# Altium PCB e-puck3-camera-4L_temp2l.PcbDoc
Units mm, origin at the board's own origin, x right, y up, seen from the top; angles counter-clockwise.
Board outline 10 x 72.98 mm, 2 copper layers (Top Layer, Bottom Layer), stack 0.049 mm thick; 16 components, 29 nets, 158 pads, 55 vias.
Unrouted connection lines stored in the file: 68.
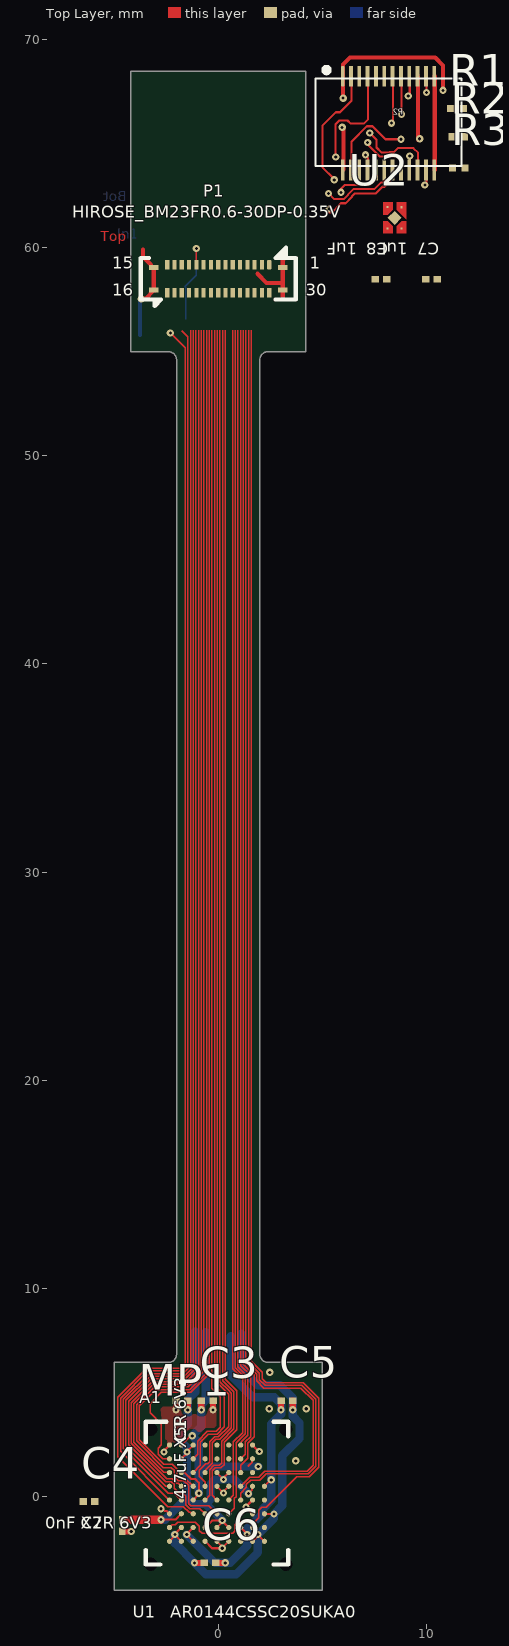
[diagram p0: Top Layer view]
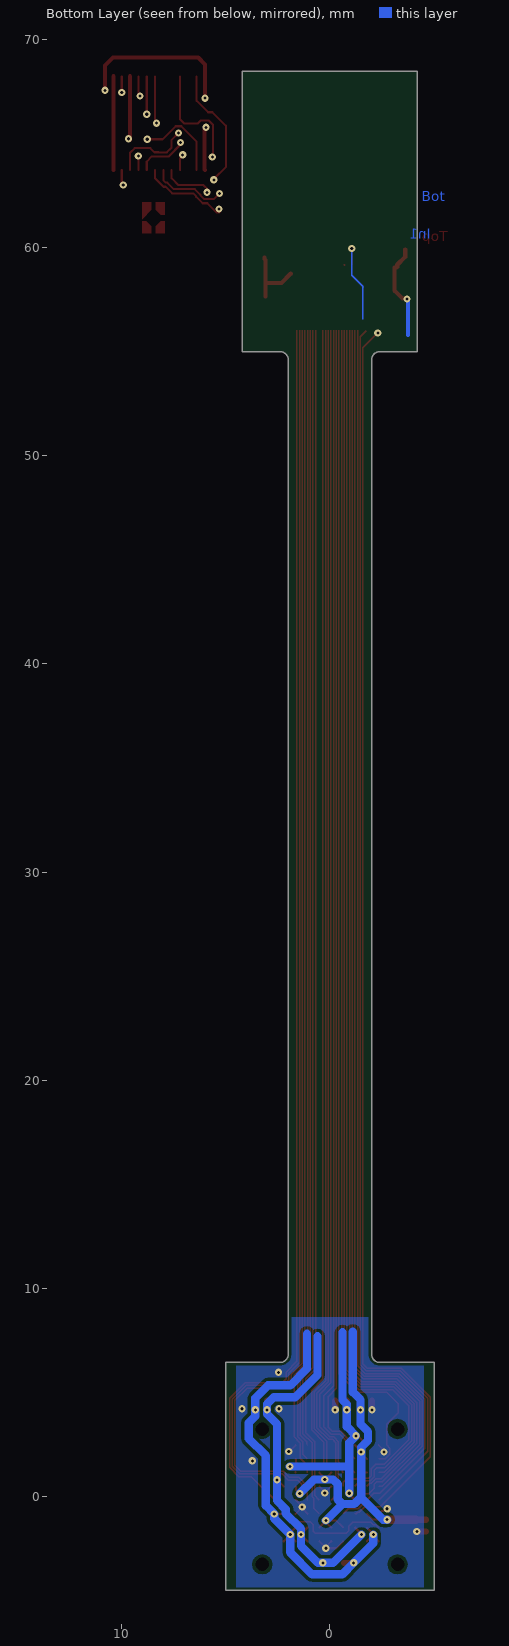
[diagram p1: Bottom Layer view, seen from below]

## Layer stack, top to bottom
Top Solder: solder mask 0.028, Solder Resist, Dk 3.5
Top Layer: signal copper 0.012
Dielectric2: prepreg 0.025, Prepeg, Dk 4.1
Bottom Layer: signal copper 0.012
Bottom Solder: solder mask 0.027, Solder Resist, Dk 3.5

## Board outline
-5,6.45 -2.4,6.45 ccw(c-2.4,6.85) -2,6.85 -2,54.6 ccw(c-2.4,54.6) -2.4,55 -4.2,55 -4.2,68.475 4.2,68.475 4.2,55 2.4,55 ccw(c2.4,54.6) 2,54.6 2,6.85 ccw(c2.4,6.85) 2.4,6.45 5,6.45 5,-4.5 -5,-4.5

## Design rules (kind name [scope] priority, off if disabled: settings)
AcuteAngle [All] p1 off: minimum=8.80000000000000E+0001 checktracksonly=FALSE
BoardOutlineClearance [All] p1: gap=0.15 ignorepadtopadclearanceinfootprint=FALSE
Clearance Clearance_Normal_Polygon [InPolygon] p1: gap=0.15 ignorepadtopadclearanceinfootprint=FALSE except(0: Arc-Hole Track-Hole SMDPad-Hole THPad-Hole Via-Hole Fill-Hole Poly-Hole Region-Hole Text-Hole)
Clearance Clearance_Normal [All] p2: gap=0.064 ignorepadtopadclearanceinfootprint=FALSE
ComponentClearance [All] p1: gap=0.3 collisioncheckmode=3 verticalgap=0.3 showdistances=TRUE
FabricationTestPointUsage TestPointUsage [All] p1: valid=0 allowmultiple=FALSE
FabricationTestpoint Testpoint [(IsPad And (OnTopLayer Or OnBottomLayer))] p1: side=3 testpointundercomponent=TRUE minsize=1.016 maxsize=2.54 preferedsize=1.524 minholesize=0 maxholesize=1.016 preferedholesize=0.813 testpointgrid=0.025 allowsidetop=TRUE allowsidebottom=TRUE usegrid=TRUE gridtolerance=0
Height [All] p1 off: minheight=0 maxheight=25.4 prefheight=12.7
HoleSize [All] p1: absolutevalues=TRUE maxlimit=6 minlimit=0.15 maxpercent=80.000 minpercent=20.000
MinimumAnnularRing [All] p1: minimumring=0.1
MinimumSolderMaskSliver [All] p1: minsoldermaskwidth=0.25
PlaneClearance [All] p1: clearance=0.4
PlaneConnect [All] p1: planeconnectstyle=Relief reliefexpansion=0.508 reliefentries=4 reliefconductorwidth=0.2 reliefairgap=0.15
PolygonConnect PolygonConnect_Via [IsVia] p1: connectstyle=Direct reliefconductorwidth=0.254 reliefentries=4 polygonreliefangle="90 Angle" airgapwidth=0.254
PolygonConnect [All] p2: connectstyle=Relief reliefconductorwidth=0.2 reliefentries=4 polygonreliefangle="90 Angle" airgapwidth=0.1
RoutingCorners [All] p1: cornerstyle=45-Degree minsetback=1 maxsetback=2.54
RoutingVias [All] p1: holewidth=0.15 width=0.35 viastyle="Through Hole" minholewidth=0.15 minwidth=0.35 maxholewidth=1 maxwidth=4
SMDToCorner [All] p1 off: distance=78740
SMDToPlane [All] p1 off: distance=118110
SilkToSilkClearance [All] p1: silktosilkclearance=0.2
SilkToSolderMaskClearance SilkscreenOverComponentPads [IsPad] p1: minsilkscreentomaskgap=0.2 clearancetoexposedcopper=TRUE
SolderMaskExpansion SolderMaskExpansion_Via [isVia] p1: expansion=-5 istentingtop=FALSE
SolderMaskExpansion [All] p2: expansion=0.1 istentingtop=FALSE
ViasUnderSMD [All] p1: allowed=FALSE
Width [All] p1: maxlimit=5 minlimit=0.064 preferedwidth=0.075 minimp=50.000000 maximp=50.000000 favimp=50.000000
19 further rules are at their usual default settings.

## Classes and differential pairs
net class HighFreq: D0 D1 D2 D3 D4 D5 D6 D7 D8 D9 D10 D11 HSYNC MCLK PIXCLK VSYNC
net class D[0..11]: D0 D1 D2 D3 D4 D5 D6 D7 D8 D9 D10 D11
net class DigitalPowers: D1V2 D3V0 DGND
net class AnalogPowers: A3V0 AGND

## Components (designator, comment, footprint, x,y, rotation, side; value= is the part's Value field where it differs from the comment)
C1 "4.7uF X5R 6V3" CAPC0201(0603)33_L -1.745,4.615 r180 top
C2 "100nF X7R 6V3" CAPC0201(0603)33_L -4.615,-1.385 r270 top
C3 "4.7uF X5R 6V3" CAPC0201(0603)33_L -0.53,4.615 r0 top
C4 "100nF X7R 6V3" CAPC0201(0603)33_L -6.2,-0.225 r0 top
C5 "4.7uF X5R 6V3" CAPC0201(0603)33_L 3.3,4.615 r180 top
C6 "100nF X7R 6V3" CAPC0201(0603)33_L -0.4,-3.177 r0 top
C7 "1uF" CAPC0201(0603)33_L 10.25,58.475 r180 top
C8 "1uF" CAPC0201(0603)33_L 7.82,58.475 r180 top
MP1 "8x8 4pin M7 holder" CASE1_AR0144 0,0 r0 top locked
P1 "HIROSE_BM23FR0.6-30DP-0.35V" HIROSE_BM23FR0.6-30DP-0.35V 0,58.5 r270 top locked
P2 "24-5805-024-000-829" "CONNECTOR 24-5805-024-000-829" 8.175,65.975 r0 top
R1 "27K" RESC0201(0603)_L 11.475,66.675 r0 top
R2 "27K" RESC0201(0603)_L 11.525,65.325 r0 top
R3 "0R" RESC0201(0603)_L 11.55,63.825 r0 top
U1 "AR0144CSSC20SUKA0" ONSEMI-ODCSP69_570BBV -0.062,0.171 r0 top locked
U2 "MIC5504-1.2YMT-TR" TDFN-4 8.475,61.425 r270 top

## Footprints (in the part's own frame and the unit in brackets; to place one, negate y for a bottom-side part, rotate by r counter-clockwise, add the part's x,y. Pads: shape width x height; smd on the part's side, far side on the other; paste and mask are expansions set on the pad)
CAPC0201(0603)33_L [mm] "Chip Capacitor, Body 0.6x0.3mm, Height 0.33mm, IPC High Density"
  rect 0.36x0.32 smd: 1(-0.28,0) 2(0.28,0)
  body extent -0.32,-0.17 0.32,0.17, height 0.33
CASE1_AR0144 [mm] "Case for AR0144 OnSemi Camera"
  round 0 hole 0.65 mask+0.05: H11(-3.25,-3.25) H11(-3.25,3.25) H11(3.25,-3.25) H11(3.25,3.25)
  body extent -4.05,-4.05 4.05,4.05, height 3.7
"CONNECTOR 24-5805-024-000-829" [mm]
  oval 0.18x1 smd mask+0: 1(-2.2,2.25)
  rect 0.18x1 smd mask+0: 2(-1.8,2.25) 3(-1.4,2.25) 4(-1,2.25) 5(-0.6,2.25) 6(-0.2,2.25) 7(0.2,2.25) 8(0.6,2.25) 9(1,2.25) 10(1.4,2.25) 11(1.8,2.25) 12(2.2,2.25) 13(-2.2,-2.25) 14(-1.8,-2.25) 15(-1.4,-2.25) 16(-1,-2.25) 17(-0.6,-2.25) 18(-0.2,-2.25) 19(0.2,-2.25) 20(0.6,-2.25) 21(1,-2.25) 22(1.4,-2.25) 23(1.8,-2.25) 24(2.2,-2.25)
  silkscreen extent -3.5,-2.05 3.5,2.67, body extent -3.5,-2.05 3.5,2.15, height 1
HIROSE_BM23FR0.6-30DP-0.35V [mm] "Hirose header BM23FR0.6 Serie, 30 leads, Plug Vertical SMT"
  rrect50% 0.46x0.2 smd mask+0.05: 1(-0.67,2.45)
  rect 0.46x0.2 smd mask+0.05: 2(-0.67,2.1) 3(-0.67,1.75) 4(-0.67,1.4) 5(-0.67,1.05) 6(-0.67,0.7) 7(-0.67,0.35) 8(-0.67,0) 9(-0.67,-0.35) 10(-0.67,-0.7) 11(-0.67,-1.05) 12(-0.67,-1.4) 13(-0.67,-1.75) 14(-0.67,-2.1) 15(-0.67,-2.45) 16(0.67,-2.45) 17(0.67,-2.1) 18(0.67,-1.75) 19(0.67,-1.4) 20(0.67,-1.05) 21(0.67,-0.7) 22(0.67,-0.35) 23(0.67,0) 24(0.67,0.35) 25(0.67,0.7) 26(0.67,1.05) 27(0.67,1.4) 28(0.67,1.75) 29(0.67,2.1) 30(0.67,2.45)
  rect 0.26x0.47 smd mask+0.05: P1(-0.54,3.1) P1(0.54,3.1) P2(-0.54,-3.1) P2(0.54,-3.1)
  silkscreen extent -1.5,-3.72 1.3,3.72, body extent -0.75,-3.48 0.75,3.47, height 0.52
ONSEMI-ODCSP69_570BBV [mm] "ODCSP69 5.545x5.565, CASE 570BV, ISSUE B"
  round 0.25 smd mask+0.065: A1(-2.28,2.31) A2(-1.71,2.31) A3(-1.14,2.31) A4(-0.57,2.31) A5(0,2.31) A6(0.57,2.31) A7(1.14,2.31) A8(1.71,2.31) B1(-2.28,1.65) B2(-1.71,1.65) B3(-1.14,1.65) B4(-0.57,1.65) B5(0,1.65) B6(0.57,1.65) B7(1.14,1.65) B8(1.71,1.65) C1(-2.28,0.99) C2(-1.71,0.99) C3(-1.14,0.99) C4(-0.57,0.99) C5(0,0.99) C6(0.57,0.99) C7(1.14,0.99) C8(1.71,0.99) D1(-2.28,0.33) D2(-1.71,0.33) D3(-1.14,0.33) D4(-0.57,0.33) D5(0,0.33) D6(0.57,0.33) D7(1.14,0.33) D8(1.71,0.33) D9(2.28,0.33) E1(-2.28,-0.33) E2(-1.71,-0.33) E3(-1.14,-0.33) E4(-0.57,-0.33) E5(0,-0.33) E6(0.57,-0.33) E7(1.14,-0.33) E8(1.71,-0.33) E9(2.28,-0.33) F1(-2.28,-0.99) F2(-1.71,-0.99) F3(-1.14,-0.99) F4(-0.57,-0.99) F5(0,-0.99) F6(0.57,-0.99) F7(1.14,-0.99) F8(1.71,-0.99) F9(2.28,-0.99) G1(-2.28,-1.65) G2(-1.71,-1.65) G3(-1.14,-1.65) G4(-0.57,-1.65) G5(0,-1.65) G6(0.57,-1.65) G7(1.14,-1.65) G8(1.71,-1.65) G9(2.28,-1.65) H1(-2.28,-2.31) H2(-1.71,-2.31) H3(-1.14,-2.31) H4(-0.57,-2.31) H5(0,-2.31) H6(0.57,-2.31) H7(1.14,-2.31) H8(1.71,-2.31) H9(2.28,-2.31)
  silkscreen extent -3.42,-3.43 3.42,3.43, body extent -2.77,-2.78 2.77,2.78, height 0.77
RESC0201(0603)_L [mm] "Chip Resistor, Body 0.6x0.3mm, IPC High Density"
  rect 0.35x0.35 smd: 1(-0.3,0) 2(0.3,0)
  body extent -0.31,-0.16 0.31,0.16, height 0.3
TDFN-4 [mm]
  rect 0.1x0.1 smd paste+0 mask+0: 1(-0.51,0.327) 2(-0.513,-0.339) 3(0.518,-0.346) 4(0.512,0.329)
  rect 0.48x0.48 smd rot 135 paste+0 mask+0.05: 5(0,0)
  Top Layer region: -0.75,-0.1 -0.75,-0.55 -0.15,-0.55 -0.15,-0.34 -0.39,-0.1
  Top Layer region: 0.75,-0.1 0.75,-0.55 0.15,-0.55 0.15,-0.34 0.39,-0.1
  Top Layer region: 0.75,0.1 0.75,0.55 0.15,0.55 0.15,0.34 0.39,0.1
  Top Layer region: -0.39,0.1 -0.75,0.1 -0.75,0.55 0.06,0.55
  body extent -0.5,-0.5 0.5,0.5, height 0.55

## Part data
C1 C3 C5: library part "TBD Capacitor[[/\]]0201[[/\]]1", "Capacitor TBD 0201", Capacitance=4.7uF, Case Code (Imperial)=0201, Case Code (Metric)=0603, Currentie=CHF, Dielectric=X5R, Manufacturer=Murata, Manufacturer Part Number=GRM035R60J475ME15D, Max Operating Temperature=85°C, Min Operating Temperature=-55°C, Supplier Part Number 1=490-13230-1-ND, Tolerance=20%, Voltage Rating=6.3V, Case/Package=0201, ComponentLink1Description=http://search.murata.co.jp/Ceramy/image/img/A01X/G101/ENG/GRM035R60J475ME15-01.pdf?src-supplier=Digi-Key, ComponentLink1URL=http://search.murata.co.jp/Ceramy/image/img/A01X/G101/ENG/GRM035R60J475ME15-01.pdf?src-supplier=Digi-Key, DateLastUpdate="2018-10-19 / 8:59:52 AM", Footprint Acort=0201, Length=0.024inch, Mount="Surface Mount", Packaging="Tape and Reel", Preference=1, Pricing 1="1=0.44000, 10=0.30700, 100=0.18420, 500=0.13818, 1000=0.11668, 2500=0.11054, 5000=0.10440 (USD)", ROHS=True, Size=0201, Stock 1=1746304, Supplier 1=Digi-Key, Thickness=0.022inch, Voltage Rating (DC)=6.3V, Width=0.012inch
C2 C4 C6 C7 C8: library part "TBD Capacitor[[/\]]0201[[/\]]1", "Capacitor TBD 0201", Currentie=CHF, DateLastUpdate="2018-10-19 / 8:59:52 AM", Footprint Acort=0201, Preference=1, ROHS=True, Size=0201
MP1: library part Case, "Any kind of case"
P1: library part HIROSE_BM23FR0.6-30DP-0.35V[[/\]]1, "2 x 15 Hirose header BM23FR0.6 Serie, 0.35 pitch, SMD, Mate at 0.6mm with receptacle, 0.3A signal contacts", Currentie=CHF, Manufacturer=Hirose, Manufacturer Nr=BM23FR0.6-30DP-0.35V, ComponentLink1Description="Supplier link", ComponentLink1URL=https://www.hirose.com/product/series/BM23FR?lang=en, DateLastUpdate="2019-09-24 / 11:10:53 AM", Footprint Acort=ToDefine, Orientation=Vertical, Preference=1, Price_1=1.03, Quant_1=1, ROHS=True, Supplier=Mouser, Supplier Nr=798-3FR0630DP035V895, Type=SMD
P2: "RCPT 24 pins camera 24-5805-024-000-829"
R1 R2 R3: library part TBD[[/\]]0201[[/\]]1, "Resistor ToDo 0201", Currentie=CHF, DateLastUpdate="2018-10-19 / 9:06:49 AM", Footprint Acort=0201, Preference=1, ROHS=True, Size=0201
U1: library part AR0144CS[[/\]]1, "AR0144CS 1/4-inch 1.0 Mp CMOS Digital Image Sensor with Global Shutter", Currentie=CHF, Manufacturer=OnSemiconductor, Manufacturer Nr=ToDefine, ComponentLink1Description="OnSemiconductor link", ComponentLink1URL=https://www.onsemi.com/PowerSolutions/search.do?searchType=others&query=AR0144, DateLastUpdate="2019-09-20 / 2:14:32 PM", Footprint Acort=ToDefine, Preference=1, ROHS=True, Size=SOIC16, Supplier=Farnell, Supplier Nr=ToDefine
U2: "IC REG LINEAR 1.2V 300MA 4TDFN", Dropout Voltage=160mV, Manufacturer=Microchip, Max Operating Temperature=125°C, Min Current Limit=400mA, Min Operating Temperature=-40°C, Output Current=300mA, Output Voltage=1.2V, Supplier Part Number 1=MIC5504-1.2YMT-CT-ND, ComponentLink1Description=http://www.microchip.com/mymicrochip/filehandler.aspx?ddocname=en580292&src-supplier=Digi-Key, ComponentLink1URL=http://www.microchip.com/mymicrochip/filehandler.aspx?ddocname=en580292&src-supplier=Digi-Key, Manufacturer Part Number=MIC5504-1.2YMT-TR, Mount="Surface Mount", Number of Regulators=1, Packaging="Tape and Reel", Pricing 1="1 = 0,16000, 25 = 0,13400, 100 = 0,12360 (USD)", ROHS=Yes, Stock 1=2603, Supplier 1=Digi-Key

## Via types
v1: diameter 0.35/0.35 (per signal layer), hole 0.15, Top Layer to Bottom Layer, tented both sides, 52 vias
v2: diameter 0.35, hole 0.15, Top Layer to Bottom Layer, 3 vias

## Nets (pads, with @x,y where several pads share a name; then routed paths per layer and width w, separated by ;. In a path a pad name is that pad's centre, name@x,y a point inside that pad or via, vN(x,y) a via of type N, cw(c..) or ccw(c..) an arc to the next point about the centre after c; other vN are vias at no path point)
/OE: P1.29 P2.5 U1.D7 | length 60.8
  Top Layer w0.064: U1.D7 1.502,0.925 1.944,0.925 2.244,1.225 4.275,1.225 4.562,1.512 4.562,4.626 3.969,5.219 2.194,5.219 1.853,5.56 1.853,5.885 1.329,6.409 1.329,7.396 1.329,56.025
/RST: P1.2 P2.14 U1.G1 | length 70.6
  Top Layer w0.064: U1.G1 -2.341,-1.479 -2.212,-1.35 -2.075,-1.35 -1.95,-1.225 -1.1,-1.225 -0.9,-1.425 -0.9,-1.625 -0.775,-1.75 0.7,-1.75 0.8,-1.65 0.8,-1.35 0.95,-1.2 1.75,-1.2 1.95,-1 1.95,-0.65 2.1,-0.5 2.3,-0.5 3.769,0.969 4.381,0.969 4.818,1.406 4.818,4.732 4.075,5.475 2.3,5.475 2.109,5.666 2.109,5.991 1.585,6.515 1.585,56.025
  Top Layer w0.1: P2.14@6.4,63.725 6.4,65.083 7.142,65.825 7.412,65.825 8.034,65.203 v1(8.775,65.203)
A3V0: C5.1 C6.1 P1.30 R3.2 U1.F9 U1.G2 U1.G8 U1.H1 U1.H2 U1.H8 U1.H9 | length 22.7
  Top Layer w0.1: U1.H1 -2.128,-1.925 -2.128,-1.857 v1(-2.084,-1.813) ; U1.H2 -2.084,-1.827 v1(-2.084,-1.813) ; U1.G2 -2.084,-1.791 v1(-2.084,-1.813) ; U1.H8 1.862,-1.925 1.862,-1.857 v1(1.906,-1.813) ; U1.G8 1.858,-1.689 1.858,-1.765 v1(1.906,-1.813) ; U1.H9 1.906,-1.827 v1(1.906,-1.813) ; U1.F9 v1@2.659,-0.819 ; v1(2.675,-0.825) v1@2.675,-0.738
  Top Layer w0.3: v1(-1.14,-3.177) C6.1 ; v1(3.58,4.175) C5.1
  Bottom Layer w0.4: v1(-2.084,-1.813) -2.084,-2.233 v1(-1.14,-3.177) -0.592,-3.725 0.85,-3.725 1.906,-2.669 v1(1.906,-1.813) 2.675,-1.044 v1(2.675,-0.825) 3.075,-0.425 3.075,1.975 3.9,2.8 3.9,3.55 3.58,3.87 v1(3.58,4.175) 3.58,4.745 2.975,5.35 1.9,5.35 1.1,6.15 1.1,7.835
ADDR: P1.28 R2.2 U1.B7 | length 54.6
  Top Layer w0.064: 1.073,56.025 1.073,6.303 1.55,5.826 1.55,2.881 1.299,2.63 1.299,2.042 U1.B7
AGND: C5.2 C6.2 P1.1 P2.1 P2.13 U1.D9 U1.G3 U1.G7 U1.H3 U1.H7 | length 29.9
  Top Layer w0.1: U1.H3 -1.514,-1.827 v1(-1.514,-1.813) -1.514,-1.791 U1.G3 ; U1.H7 1.39,-1.827 v1(1.39,-1.813) 1.39,-1.791 U1.G7 ; U1.D9 v1@2.53,0.813
  Top Layer w0.2: P2.13@6,63.725 6.021,63.746 v1@6.021,65.775 ; v1(6,67.175) 6,68.8 ; P2.1@6,68.225 6,68.8 ; v1(10.8,67.55) 10.8,68.75 10.425,69.125 6.325,69.125 6,68.8
  Top Layer w0.3: C6.2 v1(0.34,-3.177) ; v1(3.02,4.175) C5.2
  Bottom Layer w0.4: v1(-1.514,-1.813) -0.15,-3.177 0.573,-3.177 1.39,-2.36 v1(1.39,-1.813) 1.39,-1.535 2.125,-0.8 2.125,-0.6 2.544,-0.181 v1(2.544,0.813) 2.544,3.494 3.02,3.97 v1(3.02,4.175) 3.02,4.455 2.7,4.775 1.675,4.775 0.6,5.85 0.6,7.707
  other v1: 5.95,65.775
D0: P1.10 U1.F5 | length 61.6
  Top Layer w0.064: -0.689,56.025 -0.689,6.019 -1.43,5.278 -3.06,5.278 -3.922,4.416 -3.922,2.678 -3.659,2.416 -2.644,1.4 -2.25,1.4 -2.121,1.271 -2.121,0.965 -1.928,0.772 -1.654,0.772 -1.423,0.541 -1.423,-0.327 -1.325,-0.425 -0.456,-0.425 U1.F5
D1: P1.21 U1.F4 | length 61.2
  Top Layer w0.064: -1.073,56.025 -1.073,6.178 -1.589,5.662 -3.219,5.662 -4.306,4.575 -4.306,2.506 -2.525,0.725 -2.253,0.725 -2.121,0.593 -2.121,0.396 -1.875,0.15 -1.675,0.15 -1.551,0.026 -1.551,-0.38 -1.356,-0.575 -0.876,-0.575 U1.F4
D1V2: C1.1 C2.1 C8.1 P1.24 U1.A3 U1.B2 U1.C5 U1.C6 U1.D8 U1.F2 U1.G4 U1.G5 U1.G6 U2.1 | length 23
  Top Layer w0.1: v1(-2.75,-1.1) -2.053,-1.1 U1.F2 ; U1.B2 -1.5,2.093 v1(-1.5,2.15) -1.5,2.183 U1.A3 ; U1.G4 -0.298,-1.145 v1(0.196,-1.145) ; U1.G5 0.148,-1.269 0.148,-1.193 v1(0.196,-1.145) ; U1.C5 0.25,0.849 v1(0.25,0.825) 0.298,0.873 0.298,0.951 U1.C6 ; U1.G6 0.196,-1.167 v1(0.196,-1.145) ; v1(1.45,0.15) 1.45,0.157 1.627,0.334 1.627,0.48 U1.D8
  Top Layer w0.3: C2.1 -4.15,-1.105 -4.145,-1.1 ; v1(-1.465,4.175) C1.1
  Top Layer w0.4: -4.145,-1.1 v1(-2.75,-1.1)
  Bottom Layer w0.4: v1(-2.75,-1.1) -2.55,-1.1 -1.488,-0.038 ; -1.1,7.927 -1.1,5.025 -1.465,4.66 -1.465,3.485 -1.825,3.125 -1.825,2.7 -1.5,2.375 v1(-1.5,2.15) -1.5,-0.025 -1.288,-0.238 -1.175,-0.35 -0.6,-0.35 ; v1(0.196,-1.145) -0.6,-0.35 ; v1(1.45,0.15) 0.775,0.825 v1(0.25,0.825) -0.154,0.825 -0.375,0.604 -0.375,-0.125 -0.6,-0.35
D2: P1.11 U1.F3 | length 65.7
  Top Layer w0.064: v2(-2.3,55.9) -1.585,55.185 -1.585,6.39 -1.6,6.375 -1.801,6.174 -3.431,6.174 -4.818,4.787 -4.818,1.918 -2.425,-0.475 -1.675,-0.475 -1.4,-0.75 -1.321,-0.75 -1.252,-0.819 U1.F3 ; P1.11 v2(-1.05,59.95)
  Bottom Layer w0.064: -1.568,56.557 -1.568,58.093 -1.6,58.125 -1.05,58.675 v2(-1.05,59.95)
D3: P1.20 U1.E5 | length 57.2
  Top Layer w0.064: U1.E5 -0.283,0.062 -0.283,1.253 -0.154,1.382 0.132,1.382 0.287,1.537 0.287,2.612 0.884,3.209 0.884,5.084 0.335,5.633 0.335,56.025
D3V0: C3.1 C4.1 C7.1 P1.7 P2.10 R3.1 U1.A2 U1.B8 U1.C2 U1.C8 U1.E3 U2.3 U2.4 | length 17.6
  Top Layer w0.1: U1.C2 -1.611,1.161 -1.3,0.85 -1.1,0.85 -0.93,0.68 v1(-0.93,0.17) -0.93,0.113 U1.E3 ; U1.A2 -1.328,2.925 v1(-1.25,2.925) ; 1.45,1.477 1.627,1.654 1.627,1.8 U1.B8 ; U1.C8 U1.C8@1.648,1.181
  Top Layer w0.2: v1@9.6,65.175 P2.10@9.6,68.225
  Top Layer w0.3: v1(-0.81,4.175) C3.1
  Bottom Layer w0.4: v1(-0.93,0.17) -0.93,1.47 ; -0.6,7.899 -0.6,4.65 -0.81,4.44 v1(-0.81,4.175) -0.81,3.365 v1(-1.25,2.925) -0.93,2.605 -0.93,1.47 ; v2(1.925,1.45) -0.91,1.45 -0.93,1.47
  other v1: 9.675,65.225
D4: P1.12 P2.23 U1.E4 | length 57.9
  Top Layer w0.064: U1.E4 -0.411,0.062 -0.411,1.306 -0.207,1.51 0.06,1.51 0.159,1.609 0.159,2.665 0.756,3.262 0.756,5.031 0.207,5.58 0.207,56.025
  Top Layer w0.1: v1(9.925,63.003) 10,63.078 P2.23@10,63.725
D5: P1.19 P2.22 U1.E1 | length 63.5
  Top Layer w0.064: U1.E1 -4.69,2.189 -4.69,4.734 -3.378,6.046 -1.748,6.046 -1.457,6.337 -1.457,55.707 -1.75,56
  Top Layer w0.1: v1(7.277,65.5) 7.275,65.5 7.6,65.175 7.6,64.808 7.833,64.575 7.835,64.575 8.233,64.575 8.236,64.578 8.433,64.578 8.63,64.775 9.375,64.775 9.6,64.55 P2.22@9.6,63.725
D6: P1.13 P2.21 U1.E2 | length 60.5
  Top Layer w0.064: U1.E2 -2.106,0.175 -2.4,0.175 -4.562,2.337 -4.562,4.681 -3.325,5.918 -1.695,5.918 -1.329,6.284 -1.329,56.025
  Top Layer w0.1: P2.21@9.2,63.725 v1(9.2,64.4) v1@9.2,64.45
D7: P1.18 P2.20 U1.D1 | length 61.2
  Top Layer w0.064: U1.D1 -2.355,0.514 -2.514,0.514 -4.434,2.434 -4.434,4.628 -3.272,5.79 -1.642,5.79 -1.201,6.231 -1.201,56.025
  Top Layer w0.1: v1(7.175,65.05) 7.175,64.95 7.75,64.375 7.752,64.375 8.316,64.375 8.319,64.378 8.549,64.378 8.8,64.127 P2.20@8.8,63.725
D8: P1.14 P2.19 U1.D2 | length 63.4
  Top Layer w0.064: U1.D2 -1.915,0.644 -1.991,0.644 -2.2,0.853 -2.472,0.853 -4.178,2.559 -4.178,4.522 -3.166,5.534 -1.536,5.534 -0.945,6.125 -0.945,56.025
  Top Layer w0.1: v1(5.325,61.853) 5.303,61.853 5.275,61.825 5.275,61.728 5.325,61.678 5.444,61.678 5.894,62.128 6.117,62.128 6.425,62.436 6.425,62.457 6.572,62.603 7.577,62.603 7.893,62.919 7.996,62.919 8.4,63.323 P2.19@8.4,63.725
D9: P1.17 P2.18 U1.D3 | length 63
  Top Layer w0.064: U1.D3 -1.601,0.9 -1.875,0.9 -1.993,1.018 -1.993,1.337 -2.206,1.55 -2.606,1.55 -3.794,2.738 -3.794,4.363 -3.007,5.15 -1.377,5.15 -0.561,5.966 -0.561,56.025
  Top Layer w0.1: v1(5.3,62.6) 5.572,62.328 6.035,62.328 6.225,62.518 6.225,62.539 6.489,62.803 7.494,62.803 7.81,63.119 7.894,63.119 8,63.225 P2.18@8,63.725
D10: P1.15 P2.17 U1.D4 | length 59.2
  Top Layer w0.064: U1.D4 -0.632,0.707 -0.9,0.975 -0.9,1.275 -0.6,1.575 -0.506,1.575 -0.411,1.67 -0.411,2.645 -0.178,2.878 0.01,2.878 0.5,3.368 0.5,4.925 -0.049,5.474 -0.049,56.025
  Top Layer w0.1: v1(5.9,62.653) 5.825,62.728 5.825,62.75 6.078,63.003 7.28,63.003 7.6,63.323 P2.17@7.6,63.725
D11: P1.16 P2.16 U1.C1 | length 58.8
  Top Layer w0.064: U1.C1 -2.365,1.184 -2.609,1.184 -4.05,2.625 -4.05,4.469 -3.113,5.406 -1.483,5.406 -0.817,6.072 -0.817,56.025
  Top Layer w0.1: v1(7.075,64.453) 7.075,64.4 7.2,64.275 P2.16@7.2,63.725
DGND: C1.2 C2.2 C3.2 C4.2 C7.2 C8.2 P1.6 P1.25 P1.P1 P1.P2 P2.12 P2.24 R1.2 R2.1 U1.A1 U1.A8 U1.D5 U1.D6 U1.E8 U1.F1 U1.F7 U1.F8 U1.H4 U1.H5 U1.H6 U2.2 U2.5 | length 19.2
  Top Layer w0.1: v1(-2.75,-0.575) -2.682,-0.575 -2.582,-0.675 -2.486,-0.675 U1.F1 ; v1(-2.6,2.15) -2.552,2.198 -2.552,2.271 U1.A1 ; U1.H4 -0.298,-2.473 v1(0.196,-2.473) ; U1.H5 0.148,-2.349 0.148,-2.425 v1(0.196,-2.473) ; U1.D5 0.25,0.189 v1(0.25,0.175) 0.294,0.219 0.294,0.287 U1.D6 ; U1.H6 0.196,-2.451 v1(0.196,-2.473) ; U1.F7 1.288,-0.609 1.288,-0.541 v1(1.336,-0.493) 1.336,-0.471 U1.E8 ; v1@1.363,-0.534 U1.F8 ; U1.A8 1.954,2.175 v1(1.975,2.175)
  Top Layer w0.2: v1@-3.678,57.55 -3.478,57.55 -3.1,57.928 -3.1,57.96 -3.1,59.04 -3.205,59.04 -3.235,59.07 -3.235,59.175 -3.614,59.554 -3.614,59.914 ; 1.885,58.74 2.325,58.3 3.081,58.3 ; 3.1,57.653 3.1,57.96 3.1,58.3 3.1,59.04 3.1,59.399 3.15,59.449 3.15,59.524 ; P2.24@10.4,63.725 P2.12@10.4,68.225
  Top Layer w0.3: C2.2 v1(-4.175,-1.665) ; v1(-2.025,4.175) C1.2 ; v1(-0.25,4.175) C3.2
  Bottom Layer w0.2: -3.75,55.797 v1@-3.75,57.478
  other v1: 3.725,1.725 2.45,4.225 4.225,4.225 2.475,5.975 -3.7,57.528
FLASH: P1.3 U1.F6 | length 57.4
  Top Layer w0.064: U1.F6 0.775,-0.552 0.775,-0.073 0.857,0.009 0.857,2.582 1.294,3.019 1.294,5.72 0.817,6.197 0.817,56.025
HSYNC: P1.8 P2.4 U1.B1 | length 62.3
  Top Layer w0.064: U1.B1 -2.654,1.821 -2.871,2.038 -2.871,2.34 -2.725,2.486 -2.725,3.475 -3.275,4.025 -3.275,4.475 -2.728,5.022 -1.324,5.022 -0.433,5.913 -0.433,56.025
  Top Layer w0.1: v1(5.646,64.35) v1@5.65,64.346 ; v1@5.65,64.35 5.625,64.375 5.625,65.91 5.815,66.1 6.208,66.1 6.358,65.95 6.985,65.95 7.2,66.165 P2.4@7.2,68.225
MCLK: P1.22 P2.2 U1.B3 | length 61.1
  Top Layer w0.064: U1.B3 -0.981,2.042 -0.981,2.675 -0.522,3.134 -0.106,3.134 0.091,3.331 0.091,4.809 -0.305,5.205 -0.305,56.025
  Top Layer w0.1: v1(5.575,63.253) 5.575,63.291 5,63.865 5,65.85 5.65,66.5 5.85,66.5 6.4,67.05 P2.2@6.4,68.225
PIXCLK: P1.9 P2.11 U1.C3 | length 56.7
  Top Layer w0.064: U1.C3 -0.853,1.51 -0.853,2.622 -0.469,3.006 -0.053,3.006 0.3,3.359 0.3,4.85 -0.177,5.327 -0.177,56.025
  Top Layer w0.1: v1(10,67.45) P2.11@10,68.225
SCL: P1.26 P2.7 U1.C7 | length 57.5
  Top Layer w0.064: U1.C7 1.078,1.503 1.427,1.852 1.427,2.577 1.725,2.875 1.725,5.832 1.201,6.356 1.201,56.025
  Top Layer w0.1: v1@8.4,66.05 8.4,67.05 P2.7@8.4,68.225
  other v1: 8.325,65.975
SDA: P1.5 P2.8 U1.E6 | length 58.5
  Top Layer w0.064: U1.E6 0.729,0.062 0.729,2.635 1.166,3.072 1.166,5.667 0.689,6.144 0.689,56.025
  Top Layer w0.1: v1(8.8,66.4) P2.8@8.8,68.225
SHUTTER: P1.27 U1.A7 | length 53.9
  Top Layer w0.064: 0.945,56.025 0.945,6.25 1.422,5.773 1.422,2.947 1.109,2.634 1.109,2.512 U1.A7
TRIG: P1.4 R1.1 U1.E7 | length 61.5
  Top Layer w0.064: U1.E7 1.078,0.178 1.35,0.45 1.35,0.592 1.555,0.797 1.997,0.797 2.297,1.097 4.328,1.097 4.69,1.459 4.69,4.679 4.022,5.347 2.247,5.347 1.981,5.613 1.981,5.938 1.457,6.462 1.457,56.025
VSYNC: P1.23 P2.9 U1.C4 | length 56.7
  Top Layer w0.064: U1.C4 -0.596,1.197 -0.596,1.304 -0.283,1.617 -0.283,2.592 -0.125,2.75 0.063,2.75 0.628,3.315 0.628,4.978 0.5,5.106 0.079,5.527 0.079,56.025
  Top Layer w0.1: v1(9.125,67.275) 9.2,67.35 P2.9@9.2,68.225
pads on no net: MP1.H11 P2.3 P2.6 P2.15 U1.A4 U1.A5 U1.A6 U1.B4 U1.B5 U1.B6 U1.E9 U1.G9

## Polygon pours and split planes (outlines as drawn)
DGND on Top Layer "DGND_L01_P001" (solid, pour order 1): -2.757,4.325 -0.025,4.325 -0.025,3.025 0.05,2.95 0.025,2.925 -1.25,2.925 -1.225,2.9 -1.225,2.35 -2.572,2.35 -2.65,2.85
DGND on Bottom Layer "DGND" (solid, pour order 0): -4.5,8.625 4.5,8.625 4.5,-4.5 -4.5,-4.5

## Other copper
Top Layer:
  region net SHUTTER: 1.078,2.481
  text "Top" at -5.65,60.125 h0.8
Bottom Layer:
  text "Bot" at -4.4,62.05 h0.8
  text "In1" at -4.85,60.25 h0.8

## Silkscreen, mask and mechanical layers (free items; w line width, h text height)
Top Overlay:
  text "15" at -5.1,58.8 h1
  text "1" at 4.4,58.8 h1
  text "16" at -5.1,57.5 h1
  text "30" at 4.2,57.5 h1
  text "A1" at -3.8,4.3 h1
Bottom Solder:
  text "E" at -0.775,59.925 h1 r45
  text "MOBOTS" at 0.235,59.301 h1 r45
  text "Rev A -DBR" at 2.55,58.85 h1 r45
  text "22.11.2019" at 3.05,58.1 h1 r45
  text "Ý" at -4.925,56.9 h1.5 r90
  text "W" at -1.75,55.275 h1.5
  text "AR0144CS" at 7.175,-4.05 h1.5 r35
Outline:
  the board outline again, w0.001
Never:
  lines w0.01: 2.5,0 2.5,2.264 ; 5,0 5,2.264 ; 7.5,0 7.5,2.264 ; 10,0 10,2.264 ; 12.5,0 12.5,2.264 ; 15,0 15,2.264 ; 20.05,0 0,0 ; 30,-30 ccw(c30,0) 30,30 ; 30,-25 ccw(c30,0) 30,25 ; 30,-20 ccw(c30,0) 30,20 30,0 ; 30,-15 ccw(c30,0) 30,15 ; 0,0 0,2.264 cw(c0,0) 0,-2.264 0,0
  lines w0.1: 30,-30 0,2.264 ; 30,30 0,-2.264 ; 0,-2.264 30,15 30,-15 0,2.264 ; 0,-2.264 30,20 30,25 0,-2.264 ; 0,2.264 30,-25 30,-20 0,2.264
Drill Drawing:
  text ".Legend" at -14.075,-11.575 h2

## Dimensions
-4.2,68.475 to 4.2,68.475 on Outline
-4.2,-4 to -4.2,68.475 on Outline

## Text inside footprints (layer, text, board x,y; h text height)
U1: TopCourtyard "Optical" at 0.788,-0.654 h0.5; TopCourtyard "Mechanical" at 0.813,0.671 h0.5